# Altium PCB PCB_CDA.PcbDoc
Units mm, origin at the board's own origin, x right, y up, seen from the top; angles counter-clockwise.
Board outline 152.4 x 101.6 mm, 2 copper layers (Top Layer, Bottom Layer); 22 components, 23 nets, 110 pads, 0 vias.
Unrouted connection lines stored in the file: 2.
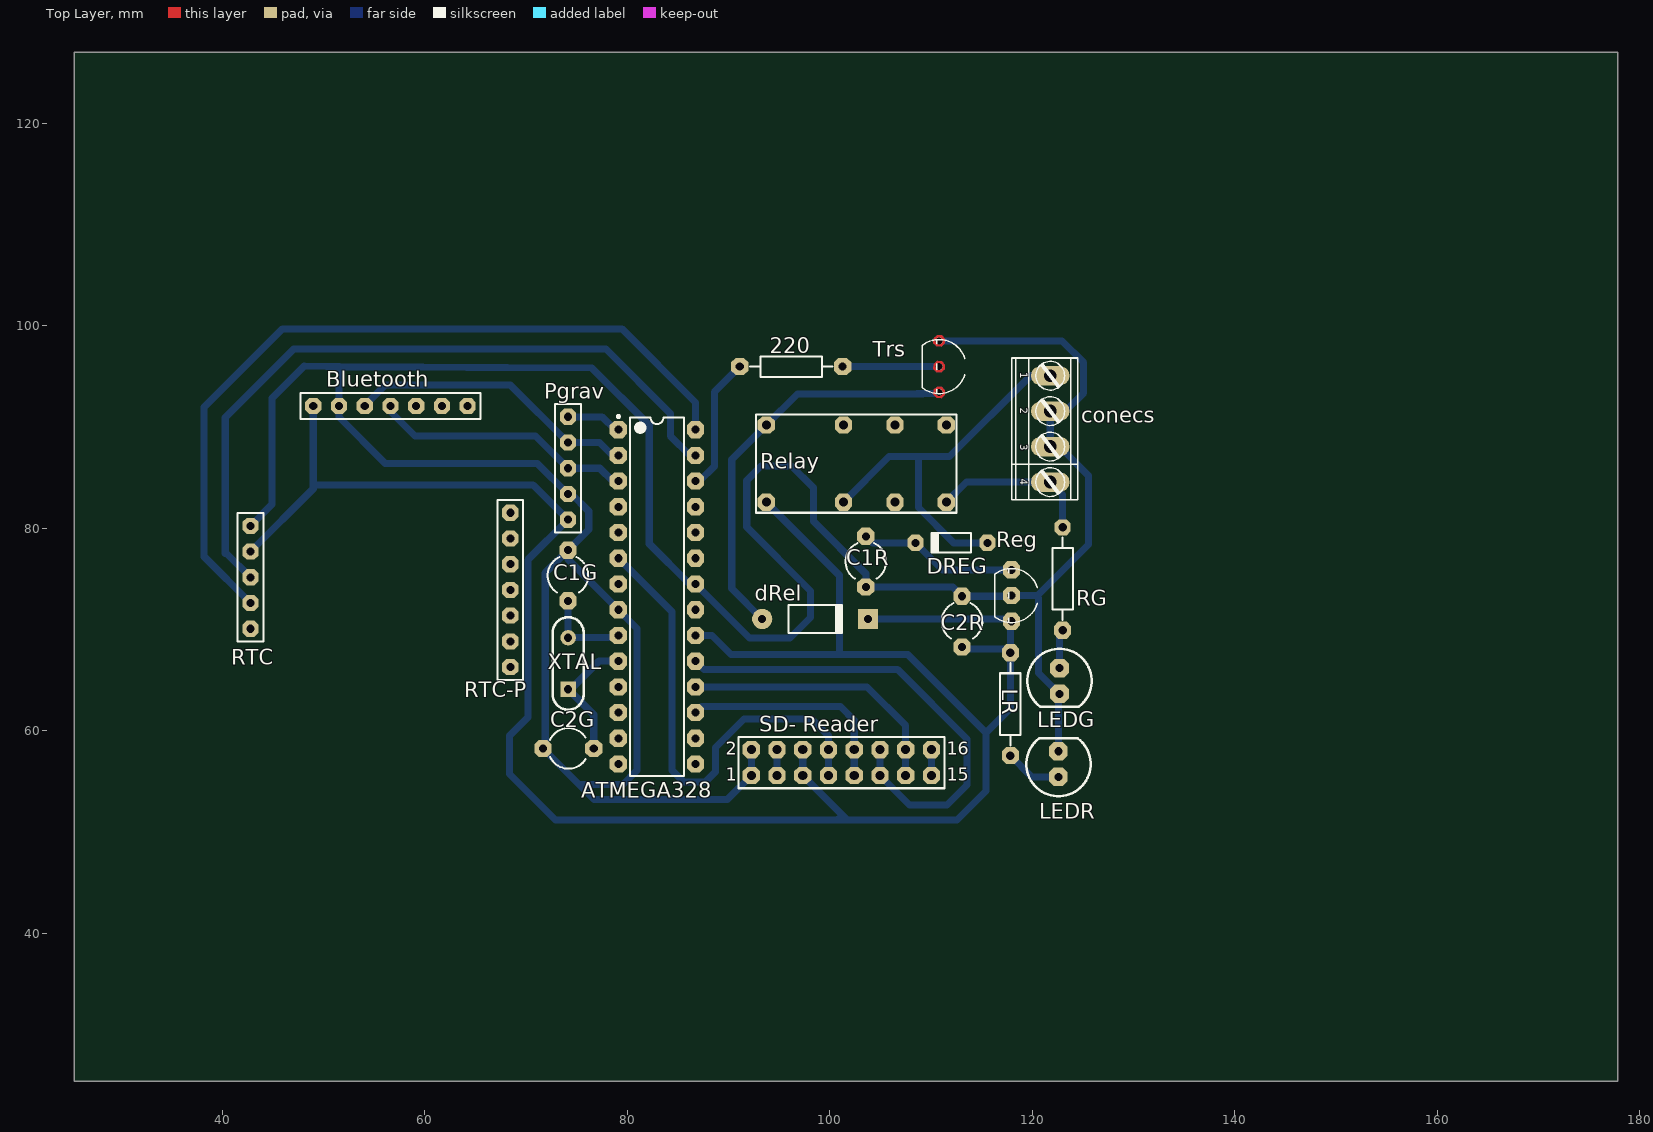
[diagram p0: Top Layer view]
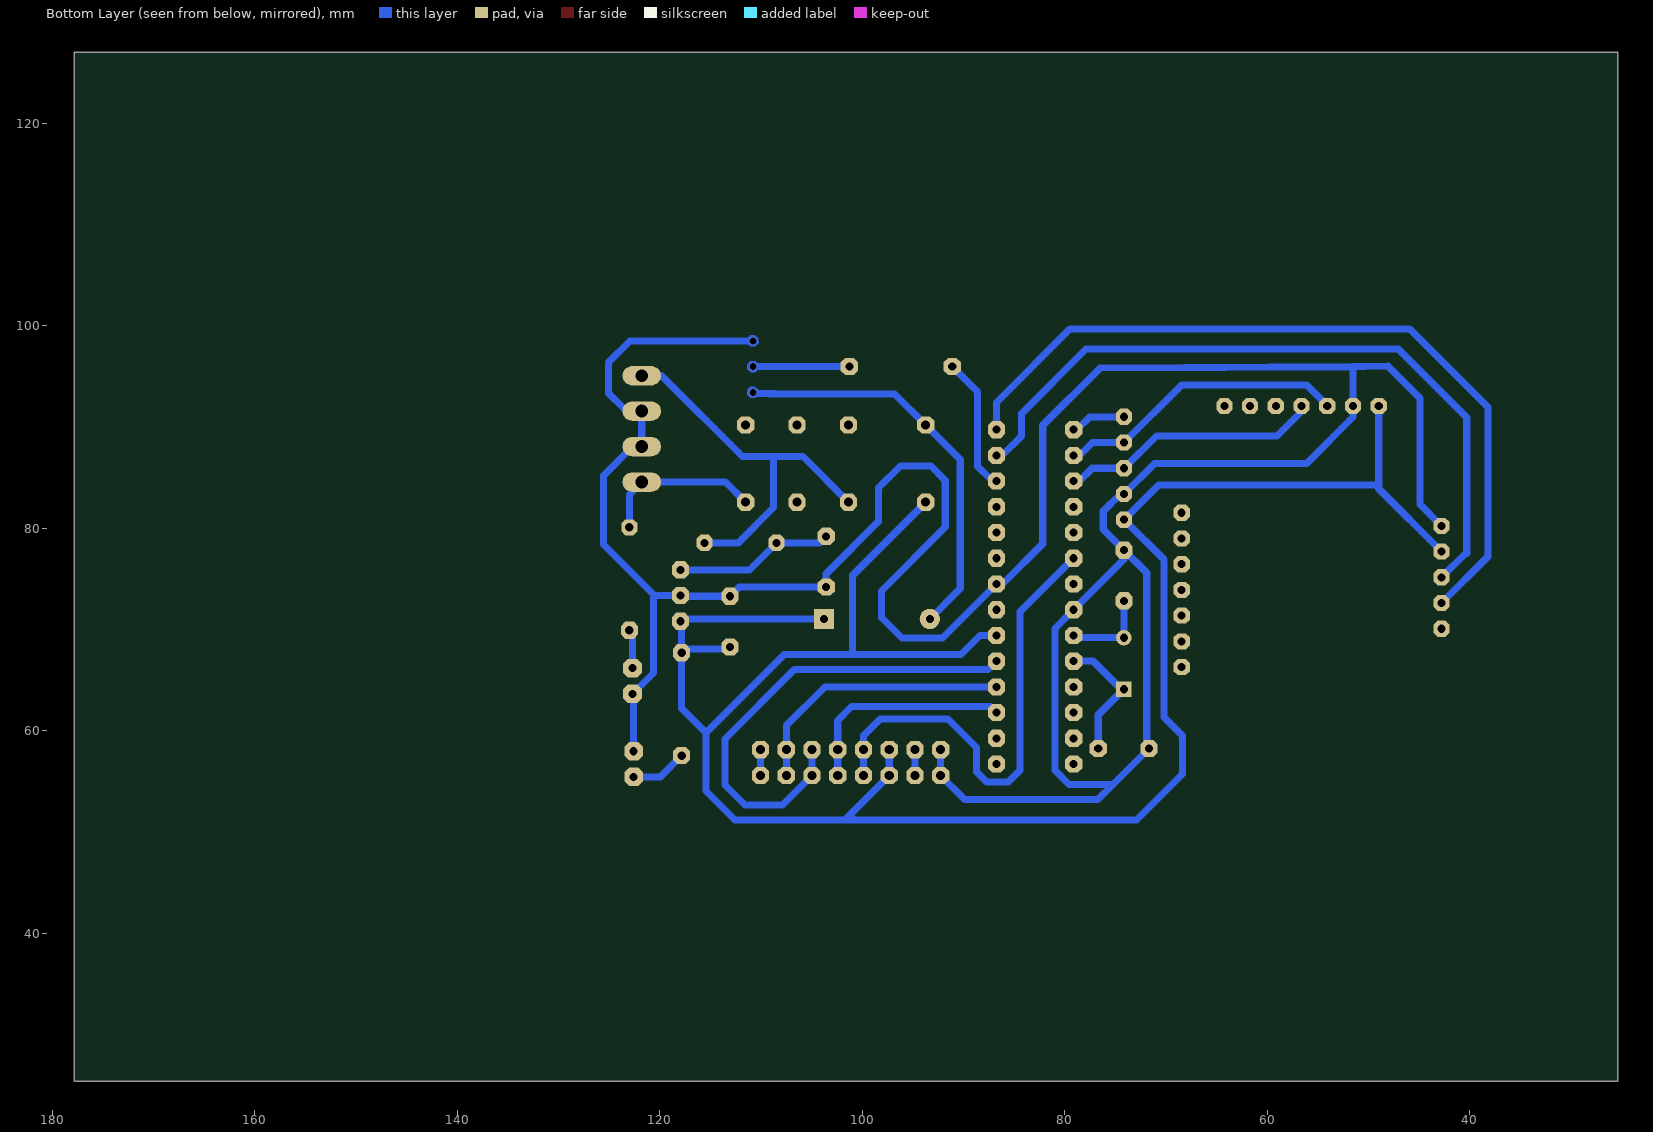
[diagram p1: Bottom Layer view, seen from below]

## Layer stack, top to bottom
Top Solder: solder mask 0.0102, Solder Resist, Dk 3.5
Top Layer: signal copper 0.0356
Dielectric 1: dielectric 0.32, FR-4, Dk 4.8
Bottom Layer: signal copper 0.0356
Bottom Solder: solder mask 0.0102, Solder Resist, Dk 3.5

## Board outline
25.4,25.4 177.8,25.4 177.8,127 25.4,127

## Design rules (kind name [scope] priority, off if disabled: settings)
Clearance [All] p1: gap=0.254
PolygonConnect [All] p1: connectstyle=Relief reliefconductorwidth=0.254 reliefentries=4 polygonreliefangle="90 Angle" airgapwidth=0.254
RoutingLayers [All] p1: top layer_v5=FALSE bottom layer_v5=TRUE
RoutingVias [All] p1: holewidth=0.711 width=1.27 viastyle="Through Hole" minholewidth=0.711 minwidth=1.27 maxholewidth=0.711 maxwidth=1.27
SolderMaskExpansion [All] p1: expansion=0.102
UnpouredPolygon [All] p1: allowunpoured=FALSE
Width [All] p1: maxlimit=0.7 minlimit=0.254 preferedwidth=0.7
28 further rules are at their usual default settings.

## Components (designator, comment, footprint, x,y, rotation, side; value= is the part's Value field where it differs from the comment)
220 "Res2" AXIAL-0.4#1 96.19,95.961 r0 top
ATMEGA328 "ATmega328P-PU" 28P3 82.931,73.228 r0 top (schematic designator Arduino)
Bluetooth "Header 7" HDR1X7 64.237,92.075 r180 top
C1G "Cap2" CAPR5-4X5 74.143,75.336 r90 top
C1R "Cap2" CAPR5-4X5 103.556,76.708 r90 top
C2G "Cap2" CAPR5-4X5 74.193,58.268 r180 top
C2R "Cap2" CAPR5-4X5 113.055,70.79 r90 top
conecs "Bt - Tv" AK550/4 121.768,89.814 r270 top
DREG "Diode 1N4148" DO-35 112.014,78.562 r180 top
dRel "Diode 1N4007" DO-41 98.552,71.044 r0 top
LEDG "LED" LED100 122.682,63.652 r180 top
LEDR "LED" LED100 122.58,57.988 r0 top
LR "Res2" AXIAL-0.4#2 117.831,62.636 r90 top
Pgrav "Header 5" HDR1X5 74.143,80.848 r90 top
Reg "7805" TO92-#1 117.932,73.355 r270 top
Relay "ALZ11B05" DS2Y 102.616,86.385 r0 top (schematic designator relay)
RG "Res2" AXIAL-0.4#3 122.987,75.006 r270 top
RTC "RTC" HDR1X5 42.799,80.239 r270 top
RTC-P "Header 7" HDR1X7 68.453,81.534 r270 top
"SD- Reader" "Header 8X2" HDR2X8 92.253,55.601 r0 top
Trs "2N3904" TO92-#2 110.795,95.961 r270 top
XTAL "CRISTAL" CRISTAL 74.168,64.11 r90 top

## Footprints (in the part's own frame and the unit in brackets; to place one, negate y for a bottom-side part, rotate by r counter-clockwise, add the part's x,y. Pads: shape width x height; smd on the part's side, far side on the other; paste and mask are expansions set on the pad)
28P3 [mm] "DIP, 28-Leads, Row Spacing 7.62mm, Pitch 2.54mm, Body 34.67x7.3mm"
  oct 1.7x1.7 hole 0.8: 1(-3.81,16.51) 2(-3.81,13.97) 3(-3.81,11.43) 4(-3.81,8.89) 5(-3.81,6.35) 6(-3.81,3.81) 7(-3.81,1.27) 8(-3.81,-1.27) 9(-3.81,-3.81) 10(-3.81,-6.35) 11(-3.81,-8.89) 12(-3.81,-11.43) 13(-3.81,-13.97) 14(-3.81,-16.51) 15(3.81,-16.51) 16(3.81,-13.97) 17(3.81,-11.43) 18(3.81,-8.89) 19(3.81,-6.35) 20(3.81,-3.81) 21(3.81,-1.27) 22(3.81,1.27) 23(3.81,3.81) 24(3.81,6.35) 25(3.81,8.89) 26(3.81,11.43) 27(3.81,13.97) 28(3.81,16.51)
  silkscreen extent -3.93,-17.7 2.65,17.93, body extent -3.6,-17.65 3.6,17.65, height 4.58
AK550/4 [mil]
  oval 75x150 hole 50: 1(-206.69,0) 2(-68.9,0) 3(69,0) 4(207,0)
  silkscreen extent -276,-150 276,107
AXIAL-0.4#1 [mm] "Axial Device, Thru-Hole; 2 Leads; 0.4 in Pin Spacing"
  oct 1.7x1.7 hole 0.8: 1(-5.08,0) 2(5.08,0)
  silkscreen extent -4.06,-1.02 4.06,1.02
AXIAL-0.4#2 [mm] "Axial Device, Thru-Hole; 2 Leads; 0.4 in Pin Spacing"
  oct 1.7x1.7 hole 0.85: 1(-5.08,0) 2(5.08,0)
  silkscreen extent -4.06,-1.02 4.06,1.02
AXIAL-0.4#3 [mm] "Axial Device, Thru-Hole; 2 Leads; 0.4 in Pin Spacing"
  oct 1.6x1.6 hole 0.85: 1(-5.08,0)
  oct 1.7x1.7 hole 0.85: 2(5.08,0)
  silkscreen extent -4.06,-1.02 4.06,1.02
CAPR5-4X5 [mm] "Capacitor; 2 Leads"
  oct 1.7x1.7 hole 0.8: 1(-2.5,0) 2(2.5,0)
  silkscreen extent -1.69,-2 1.82,2
CRISTAL [mil]
  rect 60x60 hole 31.5: 1(0,0)
  round 60 hole 31.5: 2(200,0)
  silkscreen extent -80,-60 280,60
DO-35 [mm] "Diode, Axial; Body 3.8 x 1.9 mm (LxDia. max), Lead Dia. 0.53 mm (max)"
  oct 1.6x1.6 hole 0.8: 1(-3.55,0) 2(3.55,0)
  silkscreen extent -1.95,-0.95 2.05,0.95
DO-41 [mm] "Diode, Axial; Body 5.2 x 2.7 mm (LxDia. max), Lead Dia. 0.86 mm (max)"
  round 2 hole 0.8: 1(-5.23,0)
  rect 2x2 hole 0.8: 2(5.23,0)
  silkscreen extent -2.65,-1.4 2.75,1.4
DS2Y [mm]
  oct 1.7x1.7 hole 0.889: 1(-8.89,3.81) 2(-1.27,3.81) 3(3.81,3.81) 4(8.89,3.81) 5(8.89,-3.81) 6(3.81,-3.81) 7(-1.27,-3.81) 8(-8.89,-3.81)
  silkscreen extent -9.9,-4.85 9.9,4.85
HDR1X5 [mm] "Connector; Header; 5 Position"
  oct 1.6x1.6 hole 0.8: 1(0,0) 2(2.54,0) 3(5.08,0) 4(7.62,0) 5(10.16,0)
  silkscreen extent -1.27,-1.27 11.43,1.27
HDR1X7 [mm] "Connector; Header; 7 Position"
  oct 1.6x1.6 hole 0.8: 1(0,0) 2(2.54,0) 3(5.08,0) 4(7.62,0) 5(10.16,0) 6(12.7,0) 7(15.24,0)
  silkscreen extent -1.27,-1.27 16.51,1.27
HDR2X8 [mm] "Connector; Header; 8x2 Position"
  oct 1.7x1.7 hole 0.9: 1(0,0) 2(0,2.54) 3(2.54,0) 4(2.54,2.54) 5(5.08,0) 6(5.08,2.54) 7(7.62,0) 8(7.62,2.54) 9(10.16,0) 10(10.16,2.54) 11(12.7,0) 12(12.7,2.54) 13(15.24,0) 14(15.24,2.54) 15(17.78,0) 16(17.78,2.54)
  silkscreen extent -1.27,-1.27 19.05,3.81
LED100 [mil]
  oct 72x72 hole 31.5: 1(0,-100) 2(0,0)
  silkscreen extent -125,-175 125,50
TO92-#1 [mm]
  oct 1.7x1.7 hole 0.8: 1(-2.54,0) 2(0,0) 3(2.54,0)
  Top Layer region: -1.972,0.207 -2.285,0.547 -2.747,0.568 -3.087,0.255 -3.108,-0.207 -2.795,-0.547 -2.333,-0.568 -1.993,-0.255
  Top Layer region: 0.568,0.207 0.255,0.547 -0.207,0.568 -0.547,0.255 -0.568,-0.207 -0.255,-0.547 0.207,-0.568 0.547,-0.255
  Top Layer region: 3.108,0.207 2.795,0.547 2.333,0.568 1.993,0.255 1.972,-0.207 2.285,-0.547 2.747,-0.568 3.087,-0.255
  Bottom Layer region: -1.972,0.207 -2.285,0.547 -2.747,0.568 -3.087,0.255 -3.108,-0.207 -2.795,-0.547 -2.333,-0.568 -1.993,-0.255
  Bottom Layer region: 0.568,0.207 0.255,0.547 -0.207,0.568 -0.547,0.255 -0.568,-0.207 -0.255,-0.547 0.207,-0.568 0.547,-0.255
  Bottom Layer region: 3.108,0.207 2.795,0.547 2.333,0.568 1.993,0.255 1.972,-0.207 2.285,-0.547 2.747,-0.568 3.087,-0.255
  Multi-Layer region: -1.972,0.207 -2.285,0.547 -2.747,0.568 -3.087,0.255 -3.108,-0.207 -2.795,-0.547 -2.333,-0.568 -1.993,-0.255
  Multi-Layer region: 0.568,0.207 0.255,0.547 -0.207,0.568 -0.547,0.255 -0.568,-0.207 -0.255,-0.547 0.207,-0.568 0.547,-0.255
  Multi-Layer region: 3.108,0.207 2.795,0.547 2.333,0.568 1.993,0.255 1.972,-0.207 2.285,-0.547 2.747,-0.568 3.087,-0.255
  silkscreen extent -2.66,-1.65 2.66,2.55
TO92-#2 [mm] "TO, Flat Index; 3 In-Line, Axial Leads; Body Dia. 4.5mm; Leads 0.51 x 0.48 mm (max)"
  round 0.7 hole 0.7 mask-25.4: 1(-2.54,0) 2(0,0) 3(2.54,0)
  Top Layer region: 3.108,0.207 2.795,0.547 2.333,0.568 1.993,0.255 1.972,-0.207 2.285,-0.547 2.747,-0.568 3.087,-0.255
  Top Layer region: 0.568,0.207 0.255,0.547 -0.207,0.568 -0.547,0.255 -0.568,-0.207 -0.255,-0.547 0.207,-0.568 0.547,-0.255
  Top Layer region: -1.972,0.207 -2.285,0.547 -2.747,0.568 -3.087,0.255 -3.108,-0.207 -2.795,-0.547 -2.333,-0.568 -1.993,-0.255
  Bottom Layer region: 3.108,0.207 2.795,0.547 2.333,0.568 1.993,0.255 1.972,-0.207 2.285,-0.547 2.747,-0.568 3.087,-0.255
  Bottom Layer region: 0.568,0.207 0.255,0.547 -0.207,0.568 -0.547,0.255 -0.568,-0.207 -0.255,-0.547 0.207,-0.568 0.547,-0.255
  Bottom Layer region: -1.972,0.207 -2.285,0.547 -2.747,0.568 -3.087,0.255 -3.108,-0.207 -2.795,-0.547 -2.333,-0.568 -1.993,-0.255
  Multi-Layer region: 3.108,0.207 2.795,0.547 2.333,0.568 1.993,0.255 1.972,-0.207 2.285,-0.547 2.747,-0.568 3.087,-0.255
  Multi-Layer region: 0.568,0.207 0.255,0.547 -0.207,0.568 -0.547,0.255 -0.568,-0.207 -0.255,-0.547 0.207,-0.568 0.547,-0.255
  Multi-Layer region: -1.972,0.207 -2.285,0.547 -2.747,0.568 -3.087,0.255 -3.108,-0.207 -2.795,-0.547 -2.333,-0.568 -1.993,-0.255
  silkscreen extent -2.66,-1.65 2.66,2.55

## Part data
220 LR RG: "Resistor"
ATMEGA328: "8-bit AVR Microcontroller, 32KB Flash, 1KB EEPROM, 2KB SRAM, 28-pin PDIP, Industrial Grade (-40°C to 85°C)"
Bluetooth RTC-P: "Header, 7-Pin"
C1G C1R C2G C2R: "Capacitor"
conecs: library part "BORNE 4X5.08", "BORNE 4X5.08"
DREG: "High Conductance Fast Diode"
dRel: "1 Amp General Purpose Rectifier"
LEDG LEDR: "Light Emitting Diode"
Pgrav: "Header, 5-Pin"
Reg: "5V Positive IC TO-220 Voltage Reg IC TO-220 VOLTAGE REG 5V POSITIVE"
Relay: "LZ Relays, 5 V Coil Voltage, 400 mW Nominal Operating Power, -40 to 85 degC, 8-Pin LZ, Carton, Case, RoHS"
RTC: library part "Header 5", "Header, 5-Pin"
"SD- Reader": "Header, 8-Pin, Dual row"
Trs: "NPN General Purpose Amplifier"

## Nets (pads, with @x,y where several pads share a name; then routed paths per layer and width w, separated by ;. In a path a pad name is that pad's centre, name@x,y a point inside that pad or via, vN(x,y) a via of type N, cw(c..) or ccw(c..) an arc to the next point about the centre after c; other vN are vias at no path point)
GND-9V: "SD- Reader.1" "SD- Reader.2" ATMEGA328.8 ATMEGA328.22 Bluetooth.6 C1G.2 C1R.1 C2G.2 C2R.2 conecs.2 conecs.3 LEDG.2 LEDR.2 Pgrav.2 Reg.2 RTC.1 Trs.1 | length 316.9
  Bottom Layer w0.7: RTC.1 44.933,82.372 44.933,92.841 48.108,96.016 50.292,95.961 51.588,95.954 ; 92.253,58.141 92.253,55.601 89.891,53.238 76.723,53.238 75.249,54.712 ; Trs.1 122.936,98.501 125.07,96.368 125.07,93.37 123.264,91.564 conecs.2 conecs.3 122.682,88.062 125.552,85.192 125.552,78.384 120.523,73.355 ; Reg.2@117.881,73.406 Reg.2 ; LEDR.2 122.58,63.551 LEDG.2 120.625,65.71 120.625,73.114 120.383,73.355 Reg.2 ; 51.588,95.954 51.537,95.902 Bluetooth.6 51.537,90.983 56.109,86.411 71.12,86.411 Pgrav.2 74.498,83.388 76.2,81.686 76.2,79.894 C1G.2 ; 51.588,95.954 76.53,95.809 82.169,90.17 82.169,78.475 86.146,74.498 ATMEGA328.22 92.075,69.164 96.063,69.164 98.095,71.196 98.095,73.812 91.796,80.112 91.796,84.734 93.218,86.157 96.215,86.157 98.374,83.998 98.374,80.696 103.556,75.514 C1R.1 112.137,74.208 C2R.2 117.867,73.29 Reg.2 ; C1G.2 74.143,76.937 ATMEGA328.8 80.975,70.104 80.975,56.109 79.578,54.712 75.249,54.712 ; C1G.2 71.907,75.601 71.907,58.482 C2G.2 75.249,54.712
Net220_1: 220.1 ATMEGA328.26 | length 13.4
  Bottom Layer w0.7: ATMEGA328.26 87.147,84.658 88.595,86.106 88.595,93.447 220.1
Net220_2: 220.2 Trs.2 | length 9.5
  Bottom Layer w0.7: 220.2 Trs.2
NetArduino_1: ATMEGA328.1 Pgrav.5 | length 5.5
  Bottom Layer w0.7: Pgrav.5 77.521,91.008 78.791,89.738 ATMEGA328.1
NetArduino_2: ATMEGA328.2 Bluetooth.5 Pgrav.4 | length 28.7
  Bottom Layer w0.7: Bluetooth.5@54.102,92.151 56.109,94.158 68.453,94.158 Pgrav.4 77.267,88.468 78.537,87.198 ATMEGA328.2
NetArduino_3: ATMEGA328.3 Bluetooth.4 Pgrav.3 | length 25.9
  Bottom Layer w0.7: Bluetooth.4 56.617,91.542 59.03,89.129 70.942,89.129 Pgrav.3 77.292,85.928 78.562,84.658 ATMEGA328.3
NetArduino_6: "SD- Reader.7" "SD- Reader.8" ATMEGA328.6 | length 47.6
  Bottom Layer w0.7: ATMEGA328.6 84.404,71.755 84.404,56.109 85.547,54.966 87.732,54.966 88.722,55.956 88.722,58.369 91.516,61.163 98.222,61.163 99.873,59.512 99.873,58.141 99.873,55.601
NetArduino_9: ATMEGA328.9 C1G.1 XTAL.2 | length 8.4
  Bottom Layer w0.7: C1G.1 74.143,69.215 ATMEGA328.9@78.918,69.215
NetArduino_10: ATMEGA328.10 C2G.1 XTAL.1 | length 12.7
  Bottom Layer w0.7: XTAL.1 76.693,61.584 C2G.1 ; XTAL.1@74.422,64.11 77.191,66.878 ATMEGA328.10
NetArduino_17: "SD- Reader.9" "SD- Reader.10" ATMEGA328.17 | length 21.9
  Bottom Layer w0.7: ATMEGA328.17 87.351,62.408 101.041,62.408 102.413,61.036 102.413,58.141 102.413,55.601
NetArduino_18: "SD- Reader.13" "SD- Reader.14" ATMEGA328.18 | length 27.3
  Bottom Layer w0.7: ATMEGA328.18 103.683,64.338 107.493,60.528 107.493,58.141 107.493,55.601
NetArduino_19: "SD- Reader.11" "SD- Reader.12" ATMEGA328.19 | length 47.7
  Bottom Layer w0.7: ATMEGA328.19 87.579,66.04 106.705,66.04 113.538,59.207 113.538,54.661 111.557,52.68 107.874,52.68 104.953,55.601 104.953,58.141
NetArduino_20: "SD- Reader.5" "SD- Reader.6" ATMEGA328.20 Bluetooth.7 C2R.1 dRel.2 LR.2 Pgrav.1 Reg.3 Relay.8 RTC.2 | length 217.9
  Bottom Layer w0.7: RTC.2 48.997,83.896 Bluetooth.7 ; 49.378,84.277 70.714,84.277 Pgrav.1 70.18,76.886 70.18,61.316 68.377,59.512 68.377,55.728 72.923,51.181 112.547,51.181 115.418,54.051 115.418,59.817 ; ATMEGA328.20 88.364,69.418 90.244,67.539 100.94,67.539 ; Relay.8 100.94,75.362 100.94,67.539 ; 97.333,58.141 97.333,55.601 101.625,51.308 100.813,51.308 ; dRel.2 117.704,71.044 Reg.3 117.831,70.714 LR.2 ; C2R.1 113.273,68.072 117.475,68.072 LR.2 ; 100.94,67.539 107.696,67.539 115.418,59.817 ; 115.418,59.817 117.831,62.23 LR.2
NetArduino_27: ATMEGA328.27 RTC.3 | length 72.2
  Bottom Layer w0.7: RTC.3 40.437,77.521 40.31,77.521 40.31,90.932 47.066,97.688 77.902,97.688 84.252,91.338 84.252,89.129 86.182,87.198 ATMEGA328.27 ATMEGA328.27@86.258,87.198
NetArduino_28: ATMEGA328.28 RTC.4 | length 78.7
  Bottom Layer w0.7: RTC.4 38.227,77.191 38.227,91.973 45.949,99.695 79.477,99.695 86.741,92.431 ATMEGA328.28
NetC1R_2: C1R.2 DREG.2 Reg.1 | length 15.7
  Bottom Layer w0.7: C1R.2 104.202,78.562 DREG.2 111.131,75.895 Reg.1
Netconecs_4: conecs.4 Relay.5 RG.1 | length 16.3
  Bottom Layer w0.7: Relay.5@111.506,82.804 Relay.5 113.487,84.557 conecs.4 122.987,83.337 RG.1
NetdRel_1: dRel.1 Relay.1 Trs.3 | length 38.5
  Bottom Layer w0.7: dRel.1 90.322,74.043 90.322,86.792 Relay.1 96.799,93.269 109.189,93.269
NetLEDG_1: LEDG.1 RG.2 | length 3.9
  Bottom Layer w0.7: LEDG.1 122.682,69.621 RG.2
NetLEDR_1: LEDR.1 LR.1 | length 5.6
  Bottom Layer w0.7: LR.1 119.939,55.448 LEDR.1
"NetSD- Reader_3": "SD- Reader.3" "SD- Reader.4" | length 2.5
  Bottom Layer w0.7: 94.793,55.601 94.793,58.141
"NetSD- Reader_15": "SD- Reader.15" "SD- Reader.16" | length 2.5
  Bottom Layer w0.7: 110.033,55.601 110.033,58.141
VCC-9V: conecs.1 DREG.1 Relay.7 | length 38.9
  Bottom Layer w0.7: Relay.7 105.842,87.071 108.585,87.071 ; DREG.1 112.243,78.562 108.763,82.042 108.763,86.893 108.585,87.071 ; conecs.1 119.829,95.064 111.836,87.071 108.585,87.071
pads on no net: ATMEGA328.4 ATMEGA328.5 ATMEGA328.7 ATMEGA328.11 ATMEGA328.12 ATMEGA328.13 ATMEGA328.14 ATMEGA328.15 ATMEGA328.16 ATMEGA328.21 ATMEGA328.23 ATMEGA328.24 ATMEGA328.25 Bluetooth.1 Bluetooth.2 Bluetooth.3 Relay.2 Relay.3 Relay.4 Relay.6 RTC-P.1 RTC-P.2 RTC-P.3 RTC-P.4 RTC-P.5 RTC-P.6 RTC-P.7 RTC.5
copper on no net: | length 2.1
  Bottom Layer w0.7: 108.61,93.294 110.744,93.294

## Text inside footprints (layer, text, board x,y; h text height)
conecs: Top Overlay "4" at 118.568,84.912 h1.26 r270; Top Overlay "3" at 118.568,88.29 h1.26 r270; Top Overlay "2" at 118.568,91.914 h1.26 r270; Top Overlay "1" at 118.568,95.414 h1.26 r270
"SD- Reader": Top Overlay "2" at 89.713,57.633 h1.27; Top Overlay "1" at 89.713,55.093 h1.27; Top Overlay "15" at 111.557,55.093 h1.27; Top Overlay "16" at 111.557,57.633 h1.27